# Altium PCB solar_panel_v1(1).PcbDoc
Units mm, origin at the board's own origin, x right, y up, seen from the top; angles counter-clockwise.
Board outline 83 x 113 mm, 2 copper layers (F.Cu, B.Cu); 44 components, 32 nets, 90 pads, 14 vias.
Unrouted connection lines stored in the file: 6.
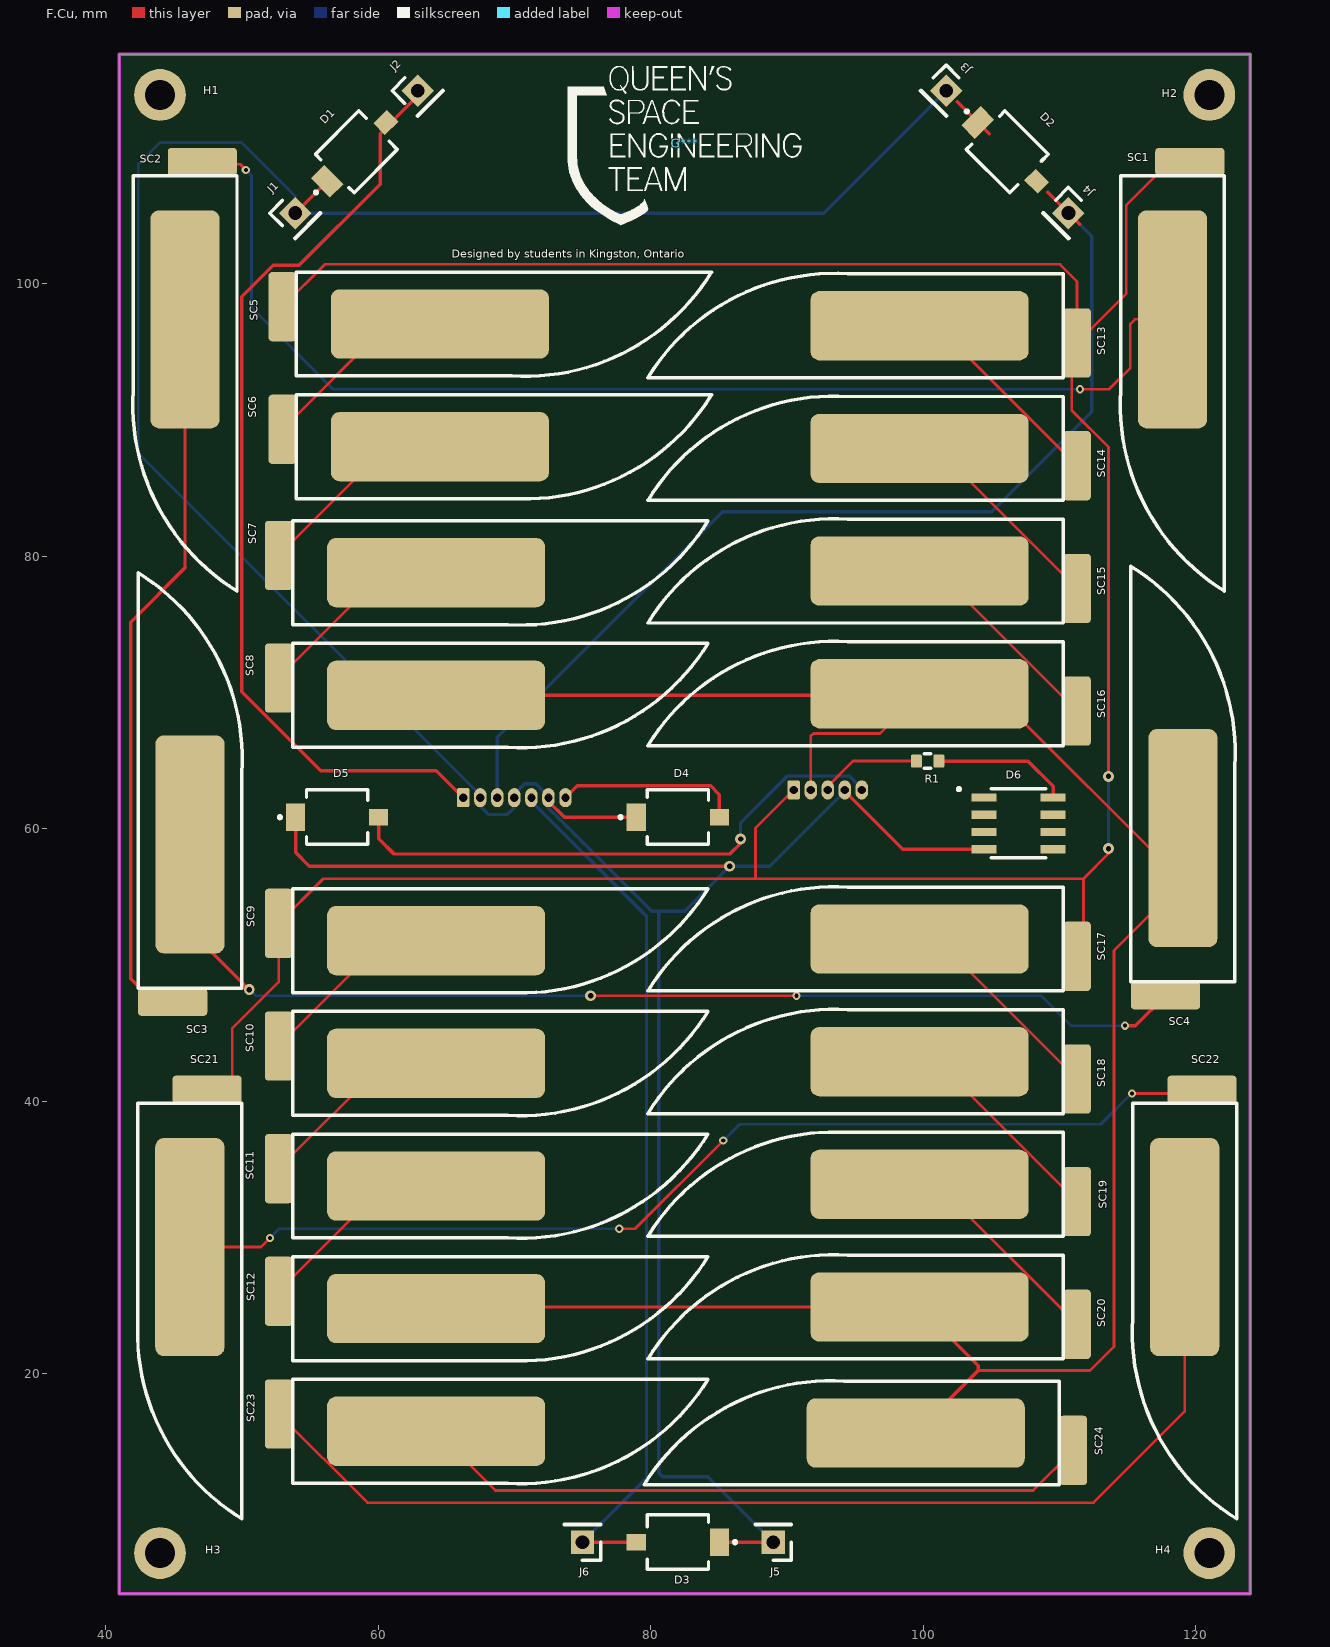
[diagram p0: F.Cu view]
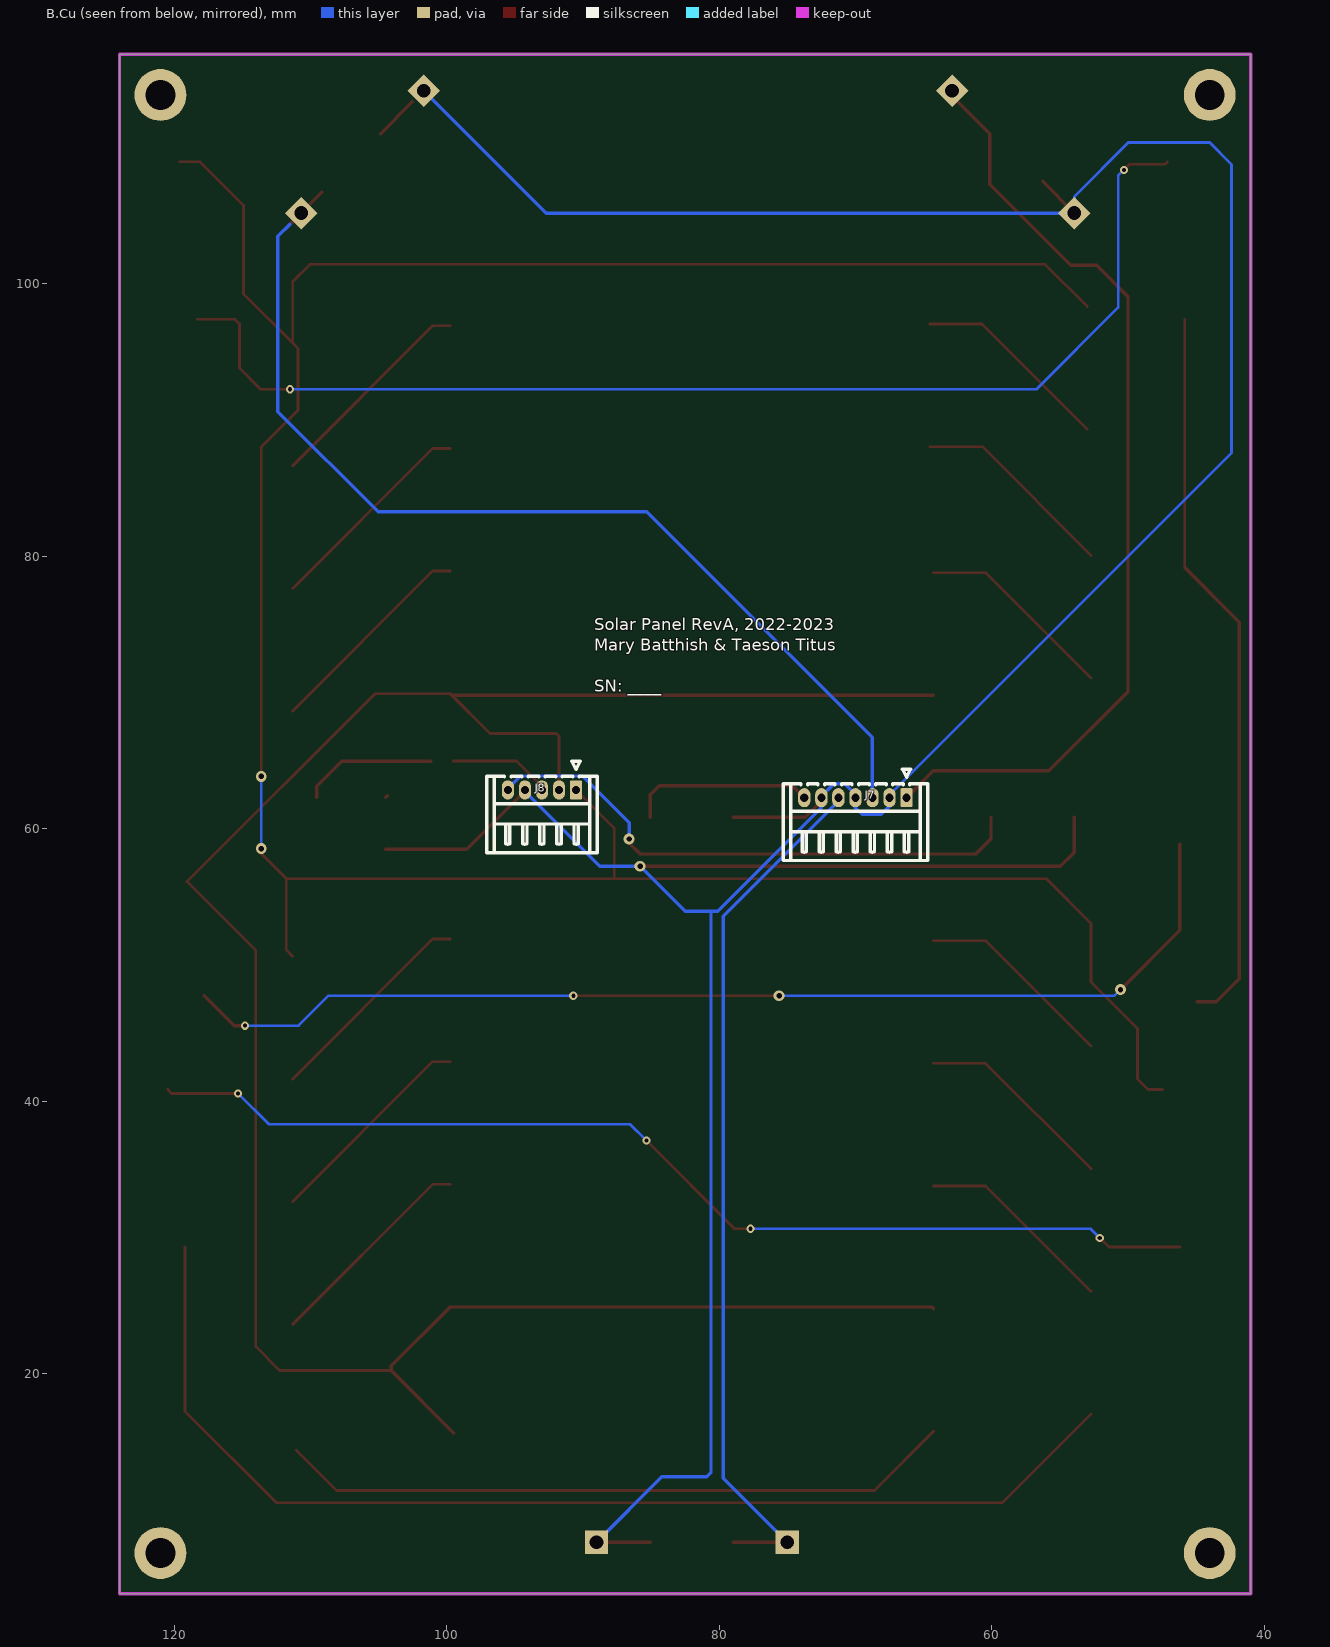
[diagram p1: B.Cu view, seen from below]

## Layer stack, top to bottom
F.Mask: solder mask 0.0102, Solder Resist, Dk 3.5
F.Cu: signal copper 0.0356
Dielectric 1: dielectric 0.32, FR-4, Dk 4.8
B.Cu: signal copper 0.0356
B.Mask: solder mask 0.0102, Solder Resist, Dk 3.5

## Board outline
124,111.85 124,15.85 124,3.85 41,3.85 41,15.85 41,111.85 41,116.85 124,116.85 124,111.85

## Design rules (kind name [scope] priority, off if disabled: settings)
Clearance [All] p1: gap=0.254 ignorepadtopadclearanceinfootprint=FALSE except(0: Arc-Hole Track-Hole SMDPad-Hole THPad-Hole Via-Hole Fill-Hole Poly-Hole Region-Hole Text-Hole)
MinimumSolderMaskSliver [All] p1: minsoldermaskwidth=0
PolygonConnect [All] p1: connectstyle=Direct reliefconductorwidth=0.254 reliefentries=4 polygonreliefangle="90 Angle" airgapwidth=0.254
RoutingVias [All] p1: holewidth=0.711 width=1.27 viastyle="Through Hole" minholewidth=0.711 minwidth=1.27 maxholewidth=0.711 maxwidth=1.27
SilkToSilkClearance [All] p1: silktosilkclearance=0
SilkToSolderMaskClearance [IsPad] p1: minsilkscreentomaskgap=0 clearancetoexposedcopper=TRUE
SolderMaskExpansion [All] p1: expansion=0.102 istentingtop=FALSE
Width [All] p1: maxlimit=10 minlimit=0.254 preferedwidth=0.254 minimp=50.000000 maximp=50.000000 favimp=50.000000
27 further rules are at their usual default settings.

## Components (designator, comment, footprint, x,y, rotation, side; value= is the part's Value field where it differs from the comment)
D1 "D_Photo" DIO_SFH_2430-Z 58.42,109.67 r45 top
D2 "D_Photo" DIO_SFH_2430-Z 106.172,109.67 r315 top
D3 "D_Photo" DIO_SFH_2430-Z 82,7.65 r180 top
D4 "D_Photo" DIO_SFH_2430-Z 82,60.85 r0 top
D5 "D_Photo" DIO_SFH_2430-Z 57,60.85 r0 top
D6 "D_Temp" SOIC127P600X175-8N 107,60.394 r0 top
G*** "LOGO" LOGO 82.55,110.305 r0 top
H1 "MountingHole" MountingHole_2.2mm_M2_DIN965_Pad 44,113.85 r0 top
H2 "MountingHole" MountingHole_2.2mm_M2_DIN965_Pad 121,113.85 r0 top
H3 "MountingHole" MountingHole_2.2mm_M2_DIN965_Pad 44,6.85 r0 top
H4 "MountingHole" MountingHole_2.2mm_M2_DIN965_Pad 121,6.85 r0 top
J1 "Conn_01x01" PinHeader_1x01_P2.54mm_Vertical#1 53.93,105.18 r45 top
J2 "Conn_01x01" PinHeader_1x01_P2.54mm_Vertical#1 62.91,114.16 r45 top
J3 "Conn_01x01" PinHeader_1x01_P2.54mm_Vertical#2 101.682,114.16 r315 top
J4 "Conn_01x01" PinHeader_1x01_P2.54mm_Vertical#1 110.662,105.18 r315 top
J5 "Conn_01x01" PinHeader_1x01_P2.54mm_Vertical#1 89,7.65 r180 top
J6 "Conn_01x01" PinHeader_1x01_P2.54mm_Vertical#1 75,7.65 r180 top
J7 "DF13-7P-1.25DS(20)" Hirose_DF13-07P-1.25DS_1x07_P1.25mm_Horizontal 66.25,62.282 r180 bottom
J8 "DF-13-5P-1.25DS" Hirose_DF13-05P-1.25DS_1x05_P1.25mm_Horizontal 90.5,62.85 r180 bottom
R1 "0" R_0603_1608Metric 100.33,64.966 r180 top
SC1 "Solar_Cell" TrisolX_Solar_Cell 122.11,107.924 r180 top
SC2 "Solar_Cell" TrisolX_Solar_Cell 49.65,107.924 r180 top
SC3 "Solar_Cell" TrisolX_Solar_Cell 42.39,48.309 r0 top
SC4 "Solar_Cell" TrisolX_Solar_Cell 115.25,48.776 r0 top
SC5 "Solar_Cell" TrisolX_Solar_Cell 54,100.85 r270 top
SC6 "Solar_Cell" TrisolX_Solar_Cell 54,91.85 r270 top
SC7 "Solar_Cell" TrisolX_Solar_Cell 53.726,82.6 r270 top
SC8 "Solar_Cell" TrisolX_Solar_Cell 53.726,73.6 r270 top
SC9 "Solar_Cell" TrisolX_Solar_Cell 53.726,55.6 r270 top
SC10 "Solar_Cell" TrisolX_Solar_Cell 53.726,46.6 r270 top
SC11 "Solar_Cell" TrisolX_Solar_Cell 53.726,37.6 r270 top
SC12 "Solar_Cell" TrisolX_Solar_Cell 53.726,28.6 r270 top
SC13 "Solar_Cell" TrisolX_Solar_Cell 110.274,93.1 r90 top
SC14 "Solar_Cell" TrisolX_Solar_Cell 110.274,84.1 r90 top
SC15 "Solar_Cell" TrisolX_Solar_Cell 110.274,75.1 r90 top
SC16 "Solar_Cell" TrisolX_Solar_Cell 110.274,66.1 r90 top
SC17 "Solar_Cell" TrisolX_Solar_Cell 110.274,48.1 r90 top
SC18 "Solar_Cell" TrisolX_Solar_Cell 110.274,39.1 r90 top
SC19 "Solar_Cell" TrisolX_Solar_Cell 110.274,30.1 r90 top
SC20 "Solar_Cell" TrisolX_Solar_Cell 110.274,21.1 r90 top
SC21 "Solar_Cell" TrisolX_Solar_Cell 50,39.85 r180 top
SC22 "Solar_Cell" TrisolX_Solar_Cell 123,39.85 r180 top
SC23 "Solar_Cell" TrisolX_Solar_Cell 53.726,19.6 r270 top
SC24 "Solar_Cell" TrisolX_Solar_Cell 110,11.85 r90 top

## Footprints (in the part's own frame and the unit in brackets; to place one, negate y for a bottom-side part, rotate by r counter-clockwise, add the part's x,y. Pads: shape width x height; smd on the part's side, far side on the other; paste and mask are expansions set on the pad)
DIO_SFH_2430-Z [mm]
  rect 1.4x1.2 smd paste-1.4 mask-1.4: 1(3.05,0)
  rect 1.4x2 smd paste-2 mask-2: 2(-3.05,0)
  silkscreen extent -4.3,-2 2.25,2
Hirose_DF13-05P-1.25DS_1x05_P1.25mm_Horizontal [mm]
  rrect25% 0.9x1.4 hole 0.6 paste-2539.97 mask+0: 1(0,0)
  rrect100% 0.9x1.4 hole 0.6 paste-2539.97 mask+0: 2(-1.25,0) 3(-2.5,0) 4(-3.75,0) 5(-5,0)
  silkscreen extent -6.56,-4.61 1.56,2.1
Hirose_DF13-07P-1.25DS_1x07_P1.25mm_Horizontal [mm]
  rrect25% 0.9x1.4 hole 0.6 paste-2539.97 mask+0: 1(0,0)
  rrect100% 0.9x1.4 hole 0.6 paste-2539.97 mask+0: 2(-1.25,0) 3(-2.5,0) 4(-3.75,0) 5(-5,0) 6(-6.25,0) 7(-7.5,0)
  silkscreen extent -9.06,-4.61 1.56,2.1
LOGO [mm]
  silkscreen extent -8.62,-6 8.53,5.67
MountingHole_2.2mm_M2_DIN965_Pad [mm]
  round 3.8 hole 2.2 paste-2539.97 mask+0: 1(0,0)
PinHeader_1x01_P2.54mm_Vertical#1 [mm]
  rect 1.7x1.7 hole 1 paste-2539.97 mask+0: 1(0,0)
  silkscreen extent -1.33,-1.33 1.33,1.33
PinHeader_1x01_P2.54mm_Vertical#2 [mm]
  rect 1.7x1.7 hole 1 paste-2539.97 mask+0: 2(0,0)
  silkscreen extent -1.33,-1.33 1.33,1.33
R_0603_1608Metric [mm]
  rrect25% 0.8x0.95 smd mask+0: 1(-0.825,0) 2(0.825,0)
  silkscreen extent -0.24,-0.52 0.24,0.52
SOIC127P600X175-8N [mm]
  rrect8% 1.84x0.61 smd mask+0: 1(-2.535,1.905) 2(-2.535,0.635) 3(-2.535,-0.635) 4(-2.535,-1.905) 5(2.535,-1.905) 6(2.535,-0.635) 7(2.535,0.635) 8(2.535,1.905)
  silkscreen extent -4.47,-2.53 2,2.61
TrisolX_Solar_Cell [mil]
  rrect25% 200x80 smd mask+0: 1(100,-40)
  rrect25% 200x630 smd mask+0: 2(150,415)
  silkscreen extent 0,0 301,1200

## Part data
D1 D2 D3 D4 D5: library part DIO_SFH_2430-Z, Sheetfile="Solar panel final.kicad_sch", ki_description=Photodiode, ki_keywords="photodiode diode opto"
D6: library part SOIC127P600X175-8N, Sheetfile="Solar panel final.kicad_sch", ki_description="Temperature dependent diode", ki_keywords="temperature sensor diode"
H1 H2 H3 H4: library part MountingHole_2.2mm_M2_DIN965_Pad, "Mounting Hole 2.2mm, M2, DIN965", Sheetfile="Solar panel final.kicad_sch", ki_description="Mounting Hole without connection", ki_keywords="mounting hole"
J1 J2 J3 J4 J5 J6: library part PinHeader_1x01_P2.54mm_Vertical, "Through hole straight pin header, 1x01, 2.54mm pitch, single row", Sheetfile="Solar panel final.kicad_sch", ki_description="Generic connector, single row, 01x01, script generated (kicad-library-utils/schlib/autogen/connector/)", ki_keywords=connector
J7: library part Hirose_DF13-07P-1.25DS_1x07_P1.25mm_Horizontal, "Hirose DF13 through hole, DF13-07P-1.25DS, 7 Pins per row (https://www.hirose.com/product/en/products/DF13/DF13-4P-1.25DS%2820%29/), generated with kicad-footprint-generator", Sheetfile="Solar panel final.kicad_sch"
J8: library part Hirose_DF13-05P-1.25DS_1x05_P1.25mm_Horizontal, "Hirose DF13 through hole, DF13-05P-1.25DS, 5 Pins per row (https://www.hirose.com/product/en/products/DF13/DF13-4P-1.25DS%2820%29/), generated with kicad-footprint-generator", Sheetfile="Solar panel final.kicad_sch", ki_description="Generic connector, single row, 01x05, script generated (kicad-library-utils/schlib/autogen/connector/)", ki_keywords=connector
R1: library part R_0603_1608Metric, "Resistor SMD 0603 (1608 Metric), square (rectangular) end terminal, IPC_7351 nominal, (Body size source: IPC-SM-782 page 72, https://www.pcb-3d.com/wordpress/wp-content/uploads/ipc-sm-782a_amendment_1_and_2.pdf), generated with kicad-footprint-generator", Sheetfile="Solar panel final.kicad_sch", ki_description=Resistor, ki_keywords="R res resistor"
SC1 SC2 SC3 SC4 SC5 SC6 SC7 SC8 SC9 SC10 SC11 SC12 SC13 SC14 SC15 SC16 SC17 SC18 SC19 SC20 SC21 SC22 SC23 SC24: library part TrisolX_Solar_Cell, Sheetfile="Solar panel final.kicad_sch", ki_description="Single solar cell", ki_keywords="solar cell"

## Via types
v1: diameter 0.6, hole 0.3, F.Cu to B.Cu, tented both sides, 8 vias
v2: diameter 0.8, hole 0.4, F.Cu to B.Cu, tented both sides, 6 vias

## Nets (pads, with @x,y where several pads share a name; then routed paths per layer and width w, separated by ;. In a path a pad name is that pad's centre, name@x,y a point inside that pad or via, vN(x,y) a via of type N, cw(c..) or ccw(c..) an arc to the next point about the centre after c; other vN are vias at no path point)
ADCS_PD_1: J7.1 | length 69
  F.Cu w0.25: 62.49,113.34 60.157,111.007 60.157,107.307 54.2,101.35 52.306,101.35 50,99.044 50,70.052 55.802,64.25 64.283,64.25 J7.1
ADCS_PD_2: J7.3 | length 72.1
  B.Cu w0.25: J7.3 68.75,66.7 85.3,83.25 105.02,83.25 112.385,90.615 112.385,103.465 111.49,104.36
ADCS_PD_3: J7.5 | length 64
  F.Cu w0.25: 75,7.65 78.95,7.65
  B.Cu w0.25: J7.5 71.25,62.032 79.7,53.582 79.7,12.35 75,7.65
ADCS_PD_4: J7.7 | length 13.6
  F.Cu w0.25: J7.7 74.618,63.15 84.4,63.15 85.05,62.5 85.05,60.85
ADSC_PD_1: D1.1 J2.1
ADSC_PD_2: D2.1 J4.1 | length 3.3
  F.Cu w0.25: 109.157,106.693 111.49,104.36
ADSC_PD_3: D3.1 J6.1
ADSC_PD_4: D4.1
ARRAY_PWR: J8.1 SC1.1 SC5.1 SC9.1 SC13.1 SC17.1 SC21.1 | length 212.5
  F.Cu w0.2: SC21.1 48.516,40.866 49.3,41.65 49.3,45.35 52.71,48.76 SC9.1 55.98,56.33 86.36,56.33 87.7,56.33 ; SC5.1 56.089,101.415 110.035,101.415 111.29,100.16 SC13.1 ; J8.1 87.7,60.05 87.7,56.33 ; SC17.1 111.76,51.11 111.76,56.33 ; v2(113.6,58.55) 113.6,58.17 111.76,56.33 ; v2(113.6,63.85) 113.6,88.013 110.9,90.713 110.9,95.25 SC13.1 ; SC1.1 118.09,108.94 114.9,105.75 114.9,99.25 SC13.1 ; 87.7,56.33 111.76,56.33
  B.Cu w0.2: v2(113.6,58.55) v2(113.6,63.85)
ARRAY_RTN: J8.2 SC4.2 SC8.2 SC12.2 SC16.2 SC20.2 SC24.2 | length 169.4
  F.Cu w0.2: J8.2@91.75,63.1 J8.2 91.75,66.8 91.948,66.998 96.821,66.998 SC16.2 105.267,69.91 119.06,56.117 114,51.057 114,22 112.25,20.25 104.049,20.25
  F.Cu w0.25: SC12.2 64.387,24.91 SC20.2 104.049,20.594 104.049,20.25 SC24.2 ; SC8.2 99.613,69.79 SC16.2
EPS_PD_1: D5.1 J8.5 | length 41.2
  F.Cu w0.25: D5.1 60.05,59.272 61.172,58.15 85.8,58.15 86.6,58.95 v2(86.6,59.25)
  B.Cu w0.25: v2(86.6,59.25) 86.6,60.428 90.047,63.875 94.571,63.875 95.5,62.946 J8.5
EPS_TMP_1: J8.3 R1.2 | length 7.5
  F.Cu w0.2: J8.3 93,63.1 94.866,64.966 R1.2
GND: D1.2 D2.2 D3.2 D4.2 D5.2 D6.4 J1.1 J3.2 J5.1 J7.2 J7.4 J7.6 J8.4 | length 277.1
  F.Cu w0.25: J1.1 D1.2 ; D5.2 53.95,58.26 54.96,57.25 v2(85.8,57.25) ; J7.6 72.5,62.032 73.682,60.85 D4.2 ; D3.2 J5.1 ; J8.4@94.25,62.664 J8.4 94.25,62.754 98.515,58.489 D6.4 ; 102.51,113.34 104.843,111.007
  B.Cu w0.2: J1.1 53.93,106.399 49.979,110.35 44,110.35 42.4,108.75 42.4,87.575 67.5,62.475 J7.2
  B.Cu w0.25: J1.1 92.702,105.18 J3.2 ; J7.2 67.5,61.65 68.1,61.05 69.5,61.05 70,61.55 J7.4 70,62.532 70.775,63.307 71.571,63.307 72.5,62.379 J7.6 72.5,61.55 80.1,53.95 80.6,53.95 ; J5.1 84.2,12.45 80.9,12.45 80.6,12.75 80.6,53.95 ; J8.4@94.25,62.754 88.746,57.25 v2(85.8,57.25) 82.5,53.95 80.6,53.95
Net-(D6-K): D6.8 R1.1 | length 10.1
  F.Cu w0.25: R1.1 107.696,64.966 109.535,63.127 D6.8 ; 104.338,62.426 104.465,62.299
Net-(SC1--): SC1.2 SC2.1 | length 87.8
  F.Cu w0.2: SC2.1 47.29,108.76 49.89,108.76 v1(50.3,108.35) ; v1(111.5,92.25) 113.644,92.25 115.2,93.806 115.2,97.05 115.533,97.383 SC1.2
  B.Cu w0.2: v1(50.3,108.35) 50.72,107.93 50.72,98.241 56.711,92.25 v1(111.5,92.25)
Net-(SC2--): SC2.2 SC3.1 | length 53.8
  F.Cu w0.2: 45.84,79.17 SC2.2
  F.Cu w0.25: SC3.1 43.53,47.293 41.84,48.983 41.84,75.17 45.84,79.17
Net-(SC3--): SC3.2 SC4.1 | length 81.7
  F.Cu w0.2: v2(75.6,47.75) v1(90.7,47.75)
  F.Cu w0.25: SC3.2 46.2,52.55 v2(50.55,48.2) ; v1(114.8,45.55) 115.58,45.55 SC4.1
  B.Cu w0.2: v2(50.55,48.2) 51,47.75 v2(75.6,47.75) ; v1(90.7,47.75) 108.656,47.75 110.856,45.55 v1(114.8,45.55)
Net-(SC5--): SC5.2 SC6.1 | length 14.8
  F.Cu w0.2: SC6.1 60.714,97.04 SC5.2
Net-(SC6--): SC6.2 SC7.1 | length 15.1
  F.Cu w0.2: SC7.1 60.69,88.04 SC6.2
Net-(SC7--): SC7.2 SC8.1 | length 14.8
  F.Cu w0.2: SC8.1 60.44,78.79 SC7.2
Net-(SC10-+): SC9.2 SC10.1 | length 14.8
  F.Cu w0.2: SC10.1 60.44,51.79 SC9.2
Net-(SC10--): SC10.2 SC11.1 | length 14.8
  F.Cu w0.2: SC11.1 60.44,42.79 SC10.2
Net-(SC11--): SC11.2 SC12.1 | length 14.8
  F.Cu w0.2: SC12.1 60.44,33.79 SC11.2
Net-(SC13--): SC13.2 SC14.1 | length 15.8
  F.Cu w0.2: SC13.2 101.02,96.91 SC14.1
Net-(SC14--): SC14.2 SC15.1 | length 15.8
  F.Cu w0.2: SC14.2 101.02,87.91 SC15.1
Net-(SC15--): SC15.2 SC16.1 | length 15.8
  F.Cu w0.2: SC15.2 101.02,78.91 SC16.1
Net-(SC17--): SC17.2 SC18.1 | length 15.8
  F.Cu w0.2: SC17.2 101.02,51.91 SC18.1
Net-(SC18--): SC18.2 SC19.1 | length 15.8
  F.Cu w0.2: SC18.2 101.02,42.91 SC19.1
Net-(SC19--): SC19.2 SC20.1 | length 15.8
  F.Cu w0.2: SC19.2 101.02,33.91 SC20.1
Net-(SC21--): SC21.2 SC22.1 | length 79.1
  F.Cu w0.2: SC21.2 51.4,29.309 v1(52.071,29.979) ; v1(77.7,30.65) 78.87,30.65 v1(85.335,37.115) ; v1(115.316,40.582) 120.176,40.582 SC22.1
  B.Cu w0.2: v1(52.071,29.979) 52.741,30.65 v1(77.7,30.65) ; v1(85.335,37.115) 86.54,38.32 113.03,38.32 115.292,40.582 v1(115.316,40.582)
Net-(SC22--): SC22.2 SC23.1 | length 84
  F.Cu w0.2: SC23.1 59.22,10.55 112.5,10.55 119.19,17.24 SC22.2
Net-(SC23--): SC23.2 SC24.1 | length 49.8
  F.Cu w0.2: SC23.2 68.607,11.45 108.076,11.45 SC24.1
pads on no net: D6.1 D6.2 D6.3 D6.5 D6.6 D6.7 H1.1 H2.1 H3.1 H4.1

## Keep-outs
Edge.Cuts:
  lines w0: 41,3.85 41,15.85 41,111.85 41,116.85 124,116.85 124,111.85 124,15.85 124,3.85 41,3.85
  lines w0.254: 41,3.85 41,15.85 41,111.85 41,116.85 124,116.85 124,111.85 124,15.85 124,3.85 41,3.85

## Silkscreen, mask and mechanical layers (free items; w line width, h text height)
F.SilkS:
  text "Designed by students in Kingston, Ontario" at 65.405,101.668 h1
B.SilkS:
  text "Solar Panel RevA, 2022-2023 / Mary Batthish & Taeson Titus /  / SN: ____" at 89.146,69.778 h1.5

## Dimensions
41,-0.15 to 124,-0.15 on F.Fab
102.51,113.34 to 111.49,104.36 on F.Fab
129,3.85 to 128,116.85 on F.Fab